# Altium PCB MSP_GSM_Borad.PcbDoc
Units mil, origin at the board's own origin, x right, y up, seen from the top; angles counter-clockwise.
Board outline 5975 x 3158 mil, 2 copper layers (Top Layer, Bottom Layer); 99 components, 97 nets, 460 pads, 782 vias.
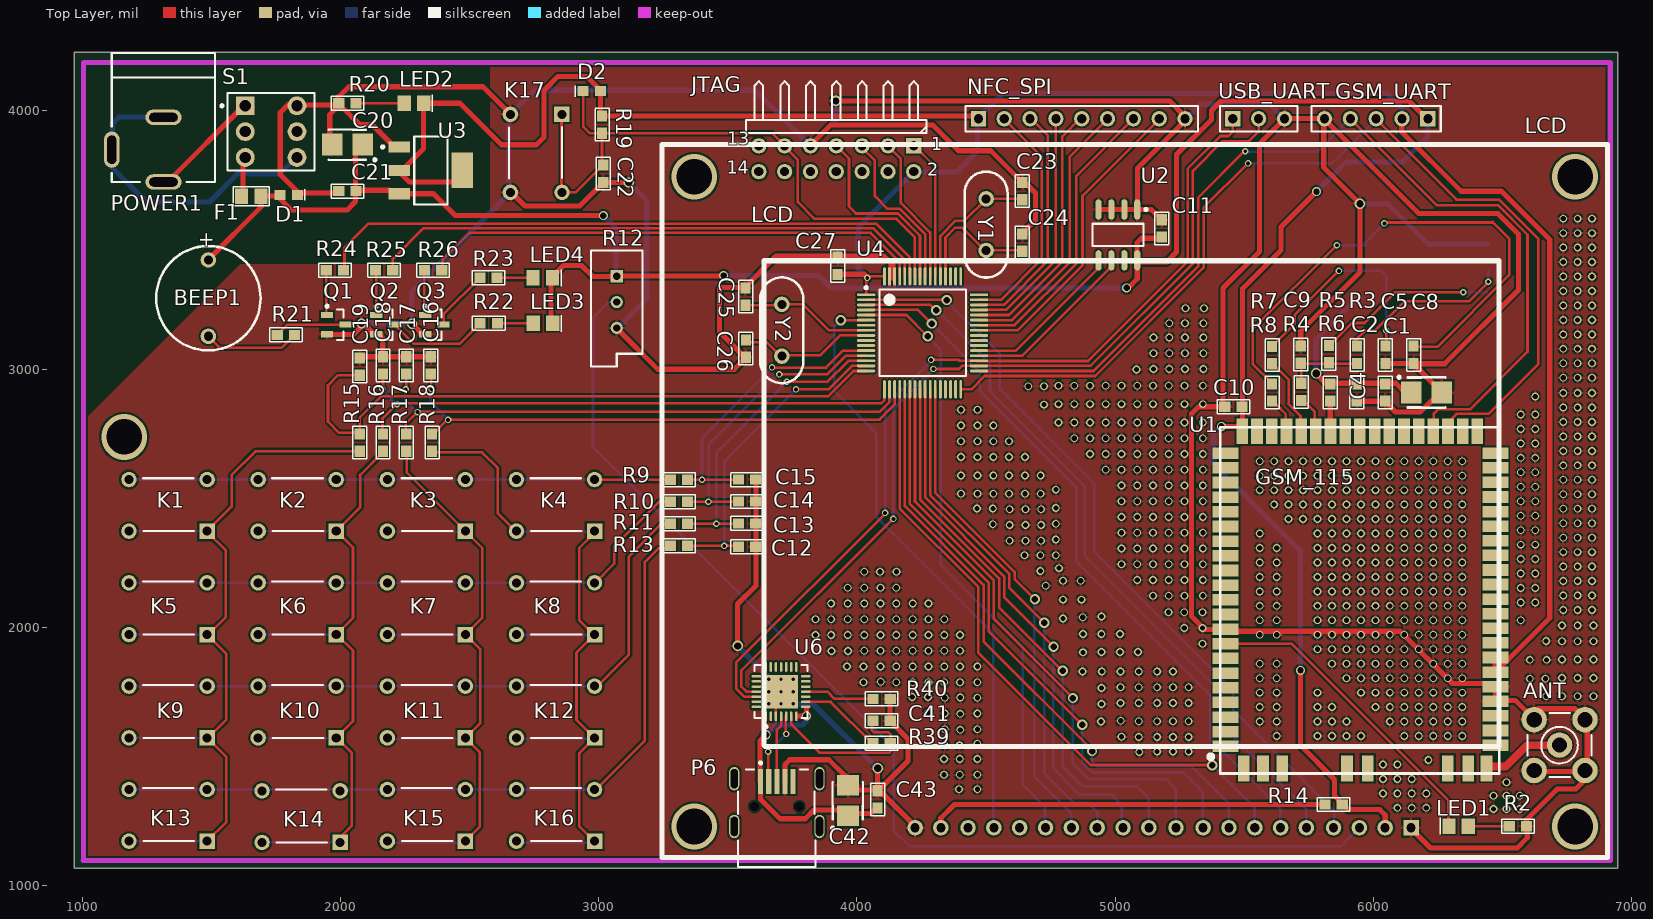
[diagram p0: Top Layer view]
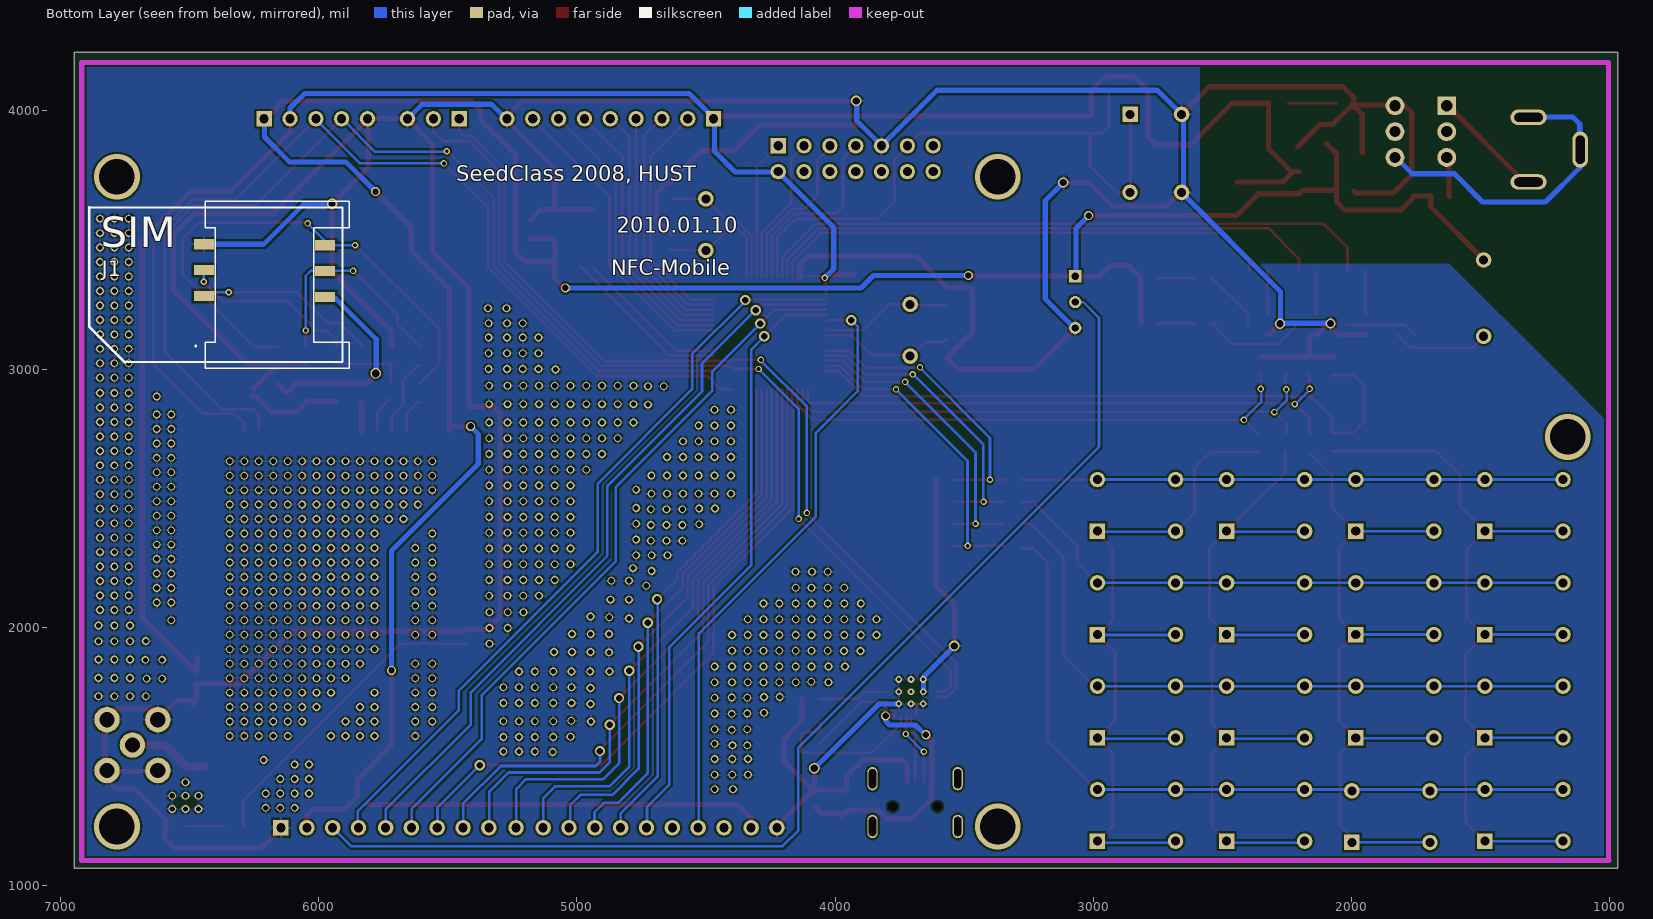
[diagram p1: Bottom Layer view, seen from below]

## Layer stack, top to bottom
Top Layer: signal copper 1.4
Dielectric: dielectric 12.6, FR-4, Dk 4.8
Bottom Layer: signal copper 1.4

## Board outline
970,4227 6945,4227 6945,1069 970,1069

## Design rules (kind name [scope] priority, off if disabled: settings)
Clearance [All] p1: gap=8
ComponentClearance [All] p1: gap=10 collisioncheckmode=3 verticalgap=10
HoleSize [All] p1: absolutevalues=TRUE maxlimit=200 minlimit=1 maxpercent=80.000 minpercent=20.000
PolygonConnect [All] p1: connectstyle=Relief reliefconductorwidth=10 reliefentries=4 polygonreliefangle="90 Angle"
RoutingVias [All] p1: holewidth=20 width=30 viastyle="Through Hole" minholewidth=12 minwidth=25 maxholewidth=196.85 maxwidth=314.96
SolderMaskExpansion [All] p1: expansion=4
TestPointUsage [All] p1: valid=0 allowmultiple=FALSE
Testpoint [All] p1: side=15 testpointundercomponent=TRUE minsize=40 maxsize=100 preferedsize=60 minholesize=0 maxholesize=40 preferedholesize=32 testpointgrid=1 style=1023 order=0-112345678
Width [All] p1: maxlimit=40 minlimit=10 preferedwidth=10
17 further rules are at their usual default settings.

## Classes and differential pairs
component class MSP: BEEP1 C10 C11 C13 C14 C15 C16 C17 C18 C19 C20 C21 C22 C23 C24 C25 C26 C27 C41 C42 C43 D1 D2 F1 GSM_UART JTAG K1 K2 K3 K4 K5 K6 K7 K8 K9 K10 K11 K12 K13 K14 K15 K16 K17 LCD LED2 LED3 LED4 NFC_SPI P6 POWER1 Q1 Q2 Q3 R9 R10 R11 R12 R13 R14 R15 R16 R17 R18 R19 R20 R21 R22 R23 R24 R25 R26 R39 R40 S1 U2 U3 U4 U6 USB_UART Y1 Y2
component class GSMPart: ANT C1 C2 C4 C5 C8 C9 C10 J1 LED1 R2 R3 R4 R5 R6 R7 R8 U1

## Components (designator, comment, footprint, x,y, rotation, side; value= is the part's Value field where it differs from the comment)
ANT "SMB" SMB_V-RJ45 6720,1545 r0 top
BEEP1 "BEEP" BEEP 1489,3423 r270 top
C1 "Cap" 1608[0603] 6045,2910 r90 top
C2 "Cap" 1608[0603] 5935,2910 r90 top
C4 "CAP POL" B 6205,2910 r0 top
C5 "Cap" 1608[0603] 6045.6,3056 r90 top
C8 "Cap" 1608[0603] 6154.8,3056 r90 top
C9 "Cap" 1608[0603] 5718,3057 r270 top
C10 "Cap" 1608[0603] 5457,2855 r0 top
C11 "Cap" 1608[0603] 5180,3545 r270 top
C12 "Cap" 1608[0603] 3575,2313 r0 top
C13 "Cap" 1608[0603] 3575,2403 r0 top
C14 "Cap" 1608[0603] 3575,2488 r0 top
C15 "Cap" 1608[0603] 3575,2573 r0 top
C16 "Cap" 1608[0603] 2350,3015 r90 top
C17 "Cap" 1608[0603] 2255,3015 r90 top
C18 "Cap" 1608[0603] 2165,3015 r90 top
C19 "Cap" 1608[0603] 2075,3010 r90 top
C20 "CAP POL" B 2027,3870 r180 top
C21 "Cap" 1608[0603] 2027,3690 r0 top
C22 "Cap" 1608[0603] 3018,3757 r270 top
C23 "Cap" 1608[0603] 4640,3690 r270 top
C24 "Cap" 1608[0603] 4640,3490 r270 top
C25 "Cap" 1608[0603] 3569,3281 r90 top
C26 "Cap" 1608[0603] 3570,3080 r270 top
C27 "Cap" 1608[0603] 3925,3400 r270 top
C41 "Cap" 1608[0603] 4095,1639 r180 top
C42 "CAP POL" B 3965,1330 r90 top
C43 "Cap" 1608[0603] 4080,1335 r270 top
D1 "1N4001" "1608[0603] - POL" 1800,3675 r180 top
D2 "1N4001" "1608[0603] - POL" 2973,4077 r0 top
F1 "Fuse" 2012[0805] 1655,3670 r0 top
GSM_UART "Header 5" HDR1X5 6210,3970 r180 top
J1 "SIMCard" PCB_SIM 5880,3650 r0 bottom locked
JTAG "Header 7X2H" HDR2X7H 4220,3865 r180 top
K1 "Key" KEY-4 1484,2373.07 r180 top
K2 "Key" KEY-4 1984,2373.07 r180 top
K3 "Key" KEY-4 2484,2373.07 r180 top
K4 "Key" KEY-4 2984,2373.07 r180 top
K5 "Key" KEY-4 1484,1973.07 r180 top
K6 "Key" KEY-4 1984,1973.07 r180 top
K7 "Key" KEY-4 2484,1973.07 r180 top
K8 "Key" KEY-4 2984,1973.07 r180 top
K9 "Key" KEY-4 1484,1573.07 r180 top
K10 "Key" KEY-4 1984,1573.07 r180 top
K11 "Key" KEY-4 2484,1573.07 r180 top
K12 "Key" KEY-4 2984,1573.07 r180 top
K13 "Key" KEY-4 1484,1173.07 r180 top
K14 "Key" KEY-4 1999,1168.07 r180 top
K15 "Key" KEY-4 2484,1173.07 r180 top
K16 "Key" KEY-4 2984,1173.07 r180 top
K17 "MCU_RST" KEY-4 2858,3987 r270 top
LCD "LCD12864" LCD-20PIN 6145,1225 r0 top locked
LED1 "Red LED" "2012[0805] - POL" 6329,1231 r0 top
LED2 "LED" "2012[0805] - POL" 2285,4030 r180 top
LED3 "LED" "2012[0805] - POL" 2784.46,3178 r180 top
LED4 "LED" "2012[0805] - POL" 2783.46,3354 r180 top
NFC_SPI "Header 9" HDR1X9 4470,3970 r0 top
P6 "Mini USB-B" "MINI USB-501" 3690,1100 r270 top
POWER1 "POWER" POWER 1315,3725 r270 top
Q1 "NPN" SOT23-3L 1984,3173 r0 top
Q2 "NPN" SOT23-3L 2174,3173 r0 top
Q3 "NPN" SOT23-3L 2364,3173 r0 top
R2 "RES" 1608[0603] 6559,1231 r180 top
R3 "RES" 1608[0603] 5936.4,3056 r270 top
R4 "RES" 1608[0603] 5720.2,2912 r270 top
R5 "RES" 1608[0603] 5827.2,3059 r270 top
R6 "RES" 1608[0603] 5832,2910 r90 top
R7 "RES" 1608[0603] 5607,3055 r90 top
R8 "RES" 1608[0603] 5607,2910 r90 top
R9 "RES" 1608[0603] 3311,2572 r180 top
R10 "RES" 1608[0603] 3311,2487 r180 top
R11 "RES" 1608[0603] 3311,2402 r180 top
R12 "RPot" VR5 3070,3260 r270 top
R13 "RES" 1608[0603] 3311,2317 r180 top
R14 "Res" 1608[0603] 5845,1315 r0 top
R15 "RES" 1608[0603] 2075,2716 r270 top
R16 "RES" 1608[0603] 2165,2716 r270 top
R17 "RES" 1608[0603] 2255,2716 r270 top
R18 "RES" 1608[0603] 2355,2716 r270 top
R19 "Res" 1608[0603] 3013,3947 r90 top
R20 "Res" 1608[0603] 2027,4030 r180 top
R21 "Res" 1608[0603] 1789,3133 r180 top
R22 "Res" 1608[0603] 2574.46,3178 r180 top
R23 "Res" 1608[0603] 2573.46,3354 r180 top
R24 "Res" 1608[0603] 1979,3383 r180 top
R25 "Res" 1608[0603] 2169,3383 r180 top
R26 "Res" 1608[0603] 2359,3383 r180 top
R39 "Res" 1608[0603] 4095,1552 r180 top
R40 "Res" 1608[0603] 4095,1724 r0 top
S1 "SW-DPDT" DPDT-6 1732,3920 r0 top
U1 "GSM_115" PCB_GSM_115 5407,1435 r180 top locked
U2 "AT24C04" SOIC127P600-8AN 5010,3520 r270 top
U3 "REG1117-3.3" SOT223 2350,3770 r270 top
U4 "MSP430F14X" SQFP50P1200X1200-64N 4254,3141 r0 top locked
U6 "CP2101" QFN50P500X500-28VAN 3706,1752 r90 top
USB_UART "Header 3" HDR1X3 5455,3970 r0 top
Y1 "XTAL" XTAL 4500,3560 r90 top
Y2 "XTAL" XTAL 3709,3151 r90 top

## Footprints (in the part's own frame and the unit in brackets; to place one, negate y for a bottom-side part, rotate by r counter-clockwise, add the part's x,y. Pads: shape width x height; smd on the part's side, far side on the other; paste and mask are expansions set on the pad)
1608[0603] [mm] "Chip Capacitor; Body 1.6 x 0.8 mm (LxW typ)"
  rect 1.1x1 smd: 1(-0.85,0) 2(0.85,0)
  silkscreen extent -1.6,-0.69 1.6,0.69
"1608[0603] - POL" [mm] "Chip Capacitor; Body 1.6 x 0.8 mm (LxW typ)"
  rect 1.1x1 smd: 1(-0.85,0) 2(0.85,0)
  silkscreen extent -1.6,-0.56 -1.6,0.53
2012[0805] [mm] "Chip Resistor; Body 2.0 x 1.3 mm (LxW typ)"
  rect 1.3x1.5 smd: 1(-0.95,0) 2(0.95,0)
  silkscreen extent -1.78,-0.94 1.78,0.94
"2012[0805] - POL" [mm] "Chip Resistor; Body 2.0 x 1.3 mm (LxW typ)"
  rect 1.3x1.5 smd: 1(-0.95,0) 2(0.95,0)
  silkscreen extent -1.8,-0.81 -1.8,0.84
B [mm] "Capacitor, SM Tantalum; Body 3.5 x 2.8 mm (LxW typ)"
  rect 2x2.2 smd: 1(-1.5,0) 2(1.5,0)
  silkscreen extent -2.82,-1.5 1.85,1.62
BEEP [mil]
  round 60 hole 35: 1(0,0) 2(295.28,0)
  silkscreen extent -54,-202 350,202
DPDT-6 [mm] "Double-Pole, Double-Throw Switch; 6 Leads"
  rect 1.85x1.85 hole 1.1: 1(-2.54,2.54)
  round 1.85 hole 1.1: 2(-2.54,0) 3(-2.54,-2.54) 4(2.54,-2.54) 5(2.54,0) 6(2.54,2.54)
  silkscreen extent -4.96,-3.81 4.28,3.81
HDR1X3 [mm] "Connector; Header; 3 Position"
  rect 1.5x1.5 hole 0.9: 1(0,0)
  round 1.5 hole 0.9: 2(2.54,0) 3(5.08,0)
  silkscreen extent -1.27,-1.27 6.35,1.27
HDR1X5 [mm] "Connector; Header; 5 Position"
  rect 1.5x1.5 hole 0.9: 1(0,0)
  round 1.5 hole 0.9: 2(2.54,0) 3(5.08,0) 4(7.62,0) 5(10.16,0)
  silkscreen extent -1.27,-1.27 11.43,1.27
HDR1X9 [mm] "Connector; Header; 9 Position"
  rect 1.5x1.5 hole 0.9: 1(0,0)
  round 1.5 hole 0.9: 2(2.54,0) 3(5.08,0) 4(7.62,0) 5(10.16,0) 6(12.7,0) 7(15.24,0) 8(17.78,0) 9(20.32,0)
  silkscreen extent -1.27,-1.27 21.59,1.27
HDR2X7H [mm] "Connector; Header; 7x2 Position; Right Angle"
  rect 1.5x1.5 hole 0.9: 1(0,0)
  round 1.5 hole 0.9: 2(0,2.54) 3(2.54,0) 4(2.54,2.54) 5(5.08,0) 6(5.08,2.54) 7(7.62,0) 8(7.62,2.54) 9(10.16,0) 10(10.16,2.54) 11(12.7,0) 12(12.7,2.54) 13(15.24,0) 14(15.24,2.54)
  silkscreen extent -1.27,-6.35 16.51,-1.27
KEY-4 [mil]
  rect 60x60 hole 35: 1(0,0)
  round 60 hole 35: 1(302.36,0) 2(0,-200) 2(302.36,-200)
  silkscreen extent 50,-205 248,0
LCD-20PIN [mil]
  rect 60x60 hole 35: 1(0,0)
  round 60 hole 35: 2(-100,0) 3(-200,0) 4(-300,0) 5(-405,0) 6(-505,0) 7(-605,0) 8(-705,0) 9(-805,0) 10(-910,0) 11(-1015,0) 12(-1115,0) 13(-1215,0) 14(-1315,0) 15(-1415,0) 16(-1515,0) 17(-1615,0) 18(-1715,0) 19(-1820,0) 20(-1920,0)
  silkscreen extent -2900,-115 760,2645, body extent -2899,-116 761,2644, height 2362
"MINI USB-501" [mm]
  rect 2.5x0.5 smd: 1(-7.723,-1.6) 2(-7.723,-0.8) 3(-7.723,0) 4(-7.723,0.8) 5(-7.723,1.6)
  round 0.6 hole 0.9 unplated: MH1(-5.25,2.2) MH2(-5.25,-2.2)
  oval 2.3x1 hole 0.7 slot 1.9 at 0 deg: ""(-8.001,4.191) ""(-8.001,-4.191) ""(-3.302,4.191) ""(-3.302,-4.191)
  silkscreen extent -9.67,-3.81 0.7,3.81
PCB_GSM_115 [mil]
  rect 100x45 smd: 1(-20,-105) 2(-20,-161.75) 3(-20,-218.5) 4(-20,-275.25) 5(-20,-332) 6(-20,-388.75) 7(-20,-445.5) 8(-20,-502.25) 9(-20,-559) 10(-20,-615.75) 11(-20,-672.5) 12(-20,-729.25) 13(-20,-786) 14(-20,-842.75) 15(-20,-899.5) 16(-20,-956.25) 17(-20,-1013) 18(-20,-1069.75) 19(-20,-1126.5) 20(-20,-1183.25) 21(-20,-1240) 39(-1065,-1240) 40(-1065,-1183.5) 41(-1065,-1127) 42(-1065,-1070.5) 43(-1065,-1014) 44(-1065,-957.5) 45(-1065,-901) 46(-1065,-844.5) 47(-1065,-788) 48(-1065,-731.5) 49(-1065,-675) 50(-1065,-618.5) 51(-1065,-562) 52(-1065,-505.5) 53(-1065,-449) 54(-1065,-392.5) 55(-1065,-336) 56(-1065,-279.5) 57(-1065,-223) 58(-1065,-166.5) 59(-1065,-110)
  rect 45x100 smd: 22(-85,-1325) 23(-141.87,-1325) 24(-198.75,-1325) 25(-255.62,-1325) 26(-312.5,-1325) 27(-369.37,-1325) 28(-426.25,-1325) 29(-483.12,-1325) 30(-540,-1325) 31(-596.87,-1325) 32(-653.75,-1325) 33(-710.62,-1325) 34(-767.5,-1325) 35(-824.37,-1325) 36(-881.25,-1325) 37(-938.12,-1325) 38(-995,-1325) 60(-1030,-20) 61(-960,-20) 62(-880,-20) 63(-570,-20) 64(-490,-20) 65(-240,-20) 66(-165,-20) 67(-90,-20)
  silkscreen extent -1080,-1340 44,0
PCB_SIM [mm]
  rect 2x1 smd: 1(2.4,9.4) 2(2.4,6.86) 3(2.4,4.32) 4(14.3,4.22) 5(14.3,6.76) 6(14.3,9.3)
  silkscreen extent 0,0 25.6,16.4
POWER [mil]
  oval 60x140 hole 35 slot 110 at 90 deg: 1(0,0) 2(-250,0)
  oval 140x60 hole 35 slot 110 at 0 deg: 2(-125,-200)
  silkscreen extent -500,-200 0,200
QFN50P500X500-28VAN [mm] "28-Pin Plastic Quad Flat No-Lead 0.5 mm Pitch"
  oval 0.95x0.25 smd: 1(-2.425,1.5) 2(-2.425,1) 3(-2.425,0.5) 4(-2.425,0) 5(-2.425,-0.5) 6(-2.425,-1) 7(-2.425,-1.5) 15(2.425,-1.5) 16(2.425,-1) 17(2.425,-0.5) 18(2.425,0) 19(2.425,0.5) 20(2.425,1) 21(2.425,1.5)
  oval 0.25x0.95 smd: 8(-1.5,-2.425) 9(-1,-2.425) 10(-0.5,-2.425) 11(0,-2.425) 12(0.5,-2.425) 13(1,-2.425) 14(1.5,-2.425) 22(1.5,2.425) 23(1,2.425) 24(0.5,2.425) 25(0,2.425) 26(-0.5,2.425) 27(-1,2.425) 28(-1.5,2.425)
  rect 3.3x3.3 smd: 29(0,0)
  silkscreen extent -3.57,-2.6 2.6,2.6, body extent -2.58,-2.58 2.58,2.58, height 1
SMB_V-RJ45 [mm] "Connector; SMB Straight"
  round 2.5 hole 1.5: 1(0,0) 2(-2.5,-2.5) 2(-2.5,2.5) 2(2.5,-2.5) 2(2.5,2.5)
  silkscreen extent -3.15,-3.15 3.15,3.15
SOIC127P600-8AN [mm] "SOIC, 8-Leads, Body 4.9x3.9mm, Pitch 1.27mm, IPC Medium Density"
  oval 2x0.6 smd: 1(-2.5,1.905) 2(-2.5,0.635) 3(-2.5,-0.635) 4(-2.5,-1.905) 5(2.5,-1.905) 6(2.5,-0.635) 7(2.5,0.635) 8(2.5,1.905)
  silkscreen extent -2.62,-2.5 1.1,2.88, body extent -2,-2.5 2,2.5, height 2.72
SOT23-3L [mm] "SOT23, 3-Leads, Body 2.9x1.3mm, Pitch 0.95mm, Lead Span 2.5mm, IPC High Density"
  rect 1.2x0.6 smd: 1(-0.9,0.95) 2(-0.9,-0.95) 3(0.9,0)
  silkscreen extent -1.02,-1.5 0.7,1.92, body extent -0.7,-1.5 0.7,1.5, height 1.1
SOT223 [mm]
  rect 1.1x2.15 smd: 1(-2.3,-3.1) 2(0,-3.1) 3(2.3,-3.1)
  rect 3.5x2.15 smd: 4(0,3.1)
  silkscreen extent -3.35,-4.85 3.35,1.63
SQFP50P1200X1200-64N [mm] "Shrink QFP, 64-Leads, Body 10x10mm, Pitch 0.5mm, IPC Medium Density"
  oval 1.8x0.279 smd: 1(-5.55,3.75) 2(-5.55,3.25) 3(-5.55,2.75) 4(-5.55,2.25) 5(-5.55,1.75) 6(-5.55,1.25) 7(-5.55,0.75) 8(-5.55,0.25) 9(-5.55,-0.25) 10(-5.55,-0.75) 11(-5.55,-1.25) 12(-5.55,-1.75) 13(-5.55,-2.25) 14(-5.55,-2.75) 15(-5.55,-3.25) 16(-5.55,-3.75) 33(5.55,-3.75) 34(5.55,-3.25) 35(5.55,-2.75) 36(5.55,-2.25) 37(5.55,-1.75) 38(5.55,-1.25) 39(5.55,-0.75) 40(5.55,-0.25) 41(5.55,0.25) 42(5.55,0.75) 43(5.55,1.25) 44(5.55,1.75) 45(5.55,2.25) 46(5.55,2.75) 47(5.55,3.25) 48(5.55,3.75)
  oval 0.279x1.8 smd: 17(-3.75,-5.55) 18(-3.25,-5.55) 19(-2.75,-5.55) 20(-2.25,-5.55) 21(-1.75,-5.55) 22(-1.25,-5.55) 23(-0.75,-5.55) 24(-0.25,-5.55) 25(0.25,-5.55) 26(0.75,-5.55) 27(1.25,-5.55) 28(1.75,-5.55) 29(2.25,-5.55) 30(2.75,-5.55) 31(3.25,-5.55) 32(3.75,-5.55) 49(3.75,5.55) 50(3.25,5.55) 51(2.75,5.55) 52(2.25,5.55) 53(1.75,5.55) 54(1.25,5.55) 55(0.75,5.55) 56(0.25,5.55) 57(-0.25,5.55) 58(-0.75,5.55) 59(-1.25,5.55) 60(-1.75,5.55) 61(-2.25,5.55) 62(-2.75,5.55) 63(-3.25,5.55) 64(-3.75,5.55)
  silkscreen extent -5.67,-4.25 4.25,4.57, body extent -5,-5 5,5, height 2.2
VR5 [mm] "Potentiometer; 3 Leads"
  rect 1.2x1.2 hole 0.7: 1(-2.54,0)
  round 1.2 hole 0.7: 2(0,0) 3(2.54,0)
  silkscreen extent -5.08,-2.54 6.35,2.54
XTAL [mil]
  round 60 hole 35: 1(-100,0) 2(100,0)
  silkscreen extent -205,-83 205,83

## Part data
ANT: "SMB Straight Connector"
C1 C2 C5 C8 C9 C10 C11 C12 C13 C14 C15 C16 C17 C18 C19 C21 C22 C23 C24 C25 C26 C27 C41 C43: "Capacitor"
C4: library part Cap, "Capacitor"
C20 C42: "Polarized Capacitor (Axial)"
D1 D2: library part "Diode 1N4001", "1 Amp General Purpose Rectifier"
F1: library part FUSE1
GSM_UART USB_UART: library part "Header 4", "Header, 4-Pin"
J1: "Sim Card"
JTAG: "Header, 7-Pin, Dual row, Right Angle"
K1 K2 K3 K4 K5 K6 K7 K8 K9 K10 K11 K12 K13 K14 K15 K16 K17: library part SW-PB
LED1: library part LED
NFC_SPI: "Header, 9-Pin"
P6: library part USB, "Mini USB Type B"
R2 R3 R4 R5 R6 R7 R8 R9 R10 R11 R13 R15 R16 R17 R18: "Resistor"
R12: "Potentiometer"
R14 R19 R20 R21 R22 R23 R24 R25 R26 R39 R40: library part RES, "Resistor"
S1: "Double-Pole, Double-Throw Switch"
U1: library part GSM115
U4: library part F14X
Y1 Y2: "Crystal Oscillator"

## Via types
v1: diameter 30, hole 20, Top Layer to Bottom Layer, 710 vias
v2: diameter 25, hole 15, Top Layer to Bottom Layer, 29 vias
v3: diameter 40, hole 25, Top Layer to Bottom Layer, 13 vias
v4: diameter 25.98, hole 12.99, Top Layer to Bottom Layer, tented top, 9 vias
v5: diameter 35, hole 25, Top Layer to Bottom Layer, 8 vias
v6: diameter 40, hole 28, Top Layer to Bottom Layer, 7 vias
v7: diameter 177.17, hole 137.8, Top Layer to Bottom Layer, 5 vias
v8: diameter 40, hole 30, Top Layer to Bottom Layer, 1 vias

## Nets (pads, with @x,y where several pads share a name; then routed paths per layer and width w, separated by ;. In a path a pad name is that pad's centre, name@x,y a point inside that pad or via, vN(x,y) a via of type N, cw(c..) or ccw(c..) an arc to the next point about the centre after c; other vN are vias at no path point)
BEEP: R24.1 U4.59 | length 2440.6
  Top Layer w10: R24.1@2016,3385 2016,3471 2109,3564 4072.93,3564 4204.79,3432.14 U4.59
C0: K1.1 K5.1 K9.1 K13.1 R15.2 | length 3391.1
  Top Layer w10: K9.1@1181,1573 K9.1@1181.07,1573.07 ; K13.1@1484,1173.07 1559,1248.07 1559,1499 K9.1@1485,1573 ; K5.1@1484,1973.07 1558,1899.07 1558,1643 K9.1@1485,1570 ; K5.1@1486,1970 1557,2041 1557,2298 K1.1@1488,2367 ; K1.1@1486,2375 1579,2468 1579,2590 1671,2682 R15.2@2077,2682 ; K13.1@1486.07,1173.07 K13.1@1487,1174
  Bottom Layer w10: K5.1@1177,1973 K5.1@1486,1973 ; K1.1@1180.93,2373.07 K1.1@1484,2373.07 ; K9.1@1181.07,1573.07 K9.1@1484,1573.07 ; K13.1@1181.64,1173.07 K13.1@1486.07,1173.07
C1: K2.1 K6.1 K10.1 K14.1 R16.2 | length 2958.9
  Top Layer w10: K14.1@1985.64,1174.07 2044,1232.43 2044,1515.71 1985.64,1574.07 2049,1637.43 2049,1910.71 1985.64,1974.07 2049,2037.43 2049,2310.71 1985.64,2374.07 2076.78,2465.22 ; 2075,2589 R16.2@2165,2679 ; 2077,2465 2077,2591
  Bottom Layer w10: K10.1@1675,1571 1978,1571 K10.1@1980,1573 ; K6.1@1681.64,1973.07 1985.07,1973.07 K6.1@1987,1975 ; K2.1@1681.64,2373.07 1983.07,2373.07 K2.1@1985,2375 ; K14.1@1691,1169 1994,1169 K14.1@1997,1166
C2: K3.1 K7.1 K11.1 K15.1 R17.2 | length 2963
  Top Layer w10: R17.2@2257,2682 2257,2600 2550,2307 2550,2039.07 2484,1973.07 2542.07,1915 2542.07,1631.14 2484,1573.07 2540,1517.07 2540,1229.07 K15.1@2484,1173.07
  Bottom Layer w10: K11.1@2176,1569 K11.1@2479,1569 ; K7.1@2182.64,1971.07 K7.1@2486.07,1971.07 ; K3.1@2182.64,2371.07 K3.1@2484.07,2371.07 ; K15.1@2192,1167 K15.1@2495,1167
C3: K4.1 K8.1 K12.1 K16.1 R18.2 | length 3112.6
  Top Layer w10: R18.2@2357,2678 2549,2678 2610,2617 2610,2442 K4.1@2680,2372 ; K16.1@2980,1176 2924,1232 2924,1513 2984,1573 2914,1643 2914,1903 2984,1973 2980,1973 2924,2029 2924,2307 2980,2363 K4.1@2980,2369
  Bottom Layer w10: K12.1@2675,1569 K12.1@2978,1569 ; K8.1@2681.64,1971.07 K8.1@2985.07,1971.07 ; K4.1@2681.64,2371.07 K4.1@2983.07,2371.07 ; K16.1@2691,1167 K16.1@2994,1167
CTS: U6.23
D+: P6.3 U6.4 | length 258.5
  Top Layer w10: P6.3@3689,1407 3689,1603 3707,1621 U6.4@3707,1658
D-: P6.2 U6.5 | length 282.2
  Top Layer w10: P6.2@3657,1406 v2@3657,1519 ; v2@3725,1588 U6.5@3725,1658
  Bottom Layer w10: v2@3657,1519 3725,1587 v2@3728,1587
  other v2: 3656,1519 3726,1588
DB0: LCD.7 U4.20 | length 2545.4
  Top Layer w10: U4.20 4165.42,2461.58 4470,2157 4470,1902 4904,1468 v3@5375,1468
  Bottom Layer w10: v3@5375,1468 5539,1304 LCD.7@5539,1222
  other v3: 5376,1467
DB1: LCD.8 U4.21 | length 2432.7
  Top Layer w10: U4.21 4185.1,2470.18 4490,2165.28 4490,1946 v3@4911,1525
  Bottom Layer w10: v3(4910,1522) 4910,1481 4927,1464 5294,1464 5440,1318 LCD.8@5440,1222
DB2: LCD.9 U4.22 | length 2373.1
  Top Layer w10: U4.22 4204.79,2478.78 4510,2173.57 4510,1986 v3(4872,1624)
  Bottom Layer w10: v3(4872,1624) 4872,1479 4912,1439 5264,1439 5338,1365 LCD.9@5338,1225
DB3: LCD.10 U4.23 | length 2297.2
  Top Layer w10: U4.23 4224.47,2487.38 4530,2181.85 4530,2034 v3@4837,1727
  Bottom Layer w10: v3@4836,1729 4836,1474 4897,1413 5196,1413 5234,1375 LCD.10@5234,1221
  other v3: 4836,1727
DB4: LCD.11 U4.24 | length 2191.4
  Top Layer w10: U4.24 4244.16,2495.98 4550,2190.14 4550,2078 v3@4796,1832
  Bottom Layer w10: v3@4796,1834 4796,1463 4874,1385 5084,1385 5130,1339 LCD.11@5130,1223
  other v3: 4797,1833
DB5: LCD.12 U4.25 | length 2088.8
  Top Layer w10: U4.25 4263.84,2504.58 4570,2198.42 4570,2118 v3@4761,1927
  Bottom Layer w10: v3@4760,1929 4760,1454 4862,1352 4986,1352 5025,1313 LCD.12@5025,1224
  other v3: 4761,1926
DB6: LCD.13 U4.26 | length 1999.9
  Top Layer w10: U4.26 4283.53,2513.18 4590,2206.71 4590,2154 v3@4725.5,2018.5
  Bottom Layer w10: v3@4725.5,2018.5 4725.5,1435.5 4840,1321 4895,1321 4931,1285 LCD.13@4931,1223
  other v3: 4725,2019
DB7: LCD.14 U4.27 | length 1916.9
  Top Layer w10: U4.27 4303.21,2521.78 4610,2214.99 4610,2188 v3@4685,2113
  Bottom Layer w10: v3@4687,2113 4687,1423 4830,1280 LCD.14@4830,1223
  other v3: 4689,2110
DCD: U6.1
DSR: U6.27
DTR: U6.28
EN: LCD.6 U4.4 | length 2790.6
  Top Layer w10: U4.4 4235.42,3229.58 v3@4288.5,3176.5
  Bottom Layer w10: v3@4286,3178 4288,3178 4476,2990 4476,2915 4849,2542 4849,2256 5368,1737 5368,1568 5639,1297 LCD.6@5639,1224
  other v3: 4289,3177
GND: ANT.2 C1.1 C2.1 C4.2 C5.1 C8.1 C9.1 C10.1 C11.1 C12.2 C13.2 C14.2 C15.2 C16.2 C17.2 C18.2 C19.2 C20.2 C21.1 C22.2 C23.1 C24.1 C25.2 C26.2 C27.1 C41.1 C42.2 C43.1 D1.1 GSM_UART.5 J1.4 JTAG.9 K17.2 LCD.1 LCD.20 NFC_SPI.9 P6.4 Q1.2 Q2.2 Q3.2 R2.1 R12.3 R20.2 R40.2 S1.6 U1.9 U1.55 U1.56 U2.1 U2.2 U2.3 U2.4 U3.1 U4.62 U4.63 U6.3 U6.29 USB_UART.3 | length 23817.6
  Top Layer w10: U6.29@3659,1705 3685,1705 3686,1706 U6.3@3686,1656 ; U4.63@4126.05,3359 U4.63@4127,3359 ; U4.63@4127,3358 4127,3407
  Top Layer w20: S1.6@1827,4026 1799,4026 1767,3994 1767,3754 1839,3682 1984,3682 C21.1@1991,3689 ; S1.6@1829,4023 R20.2@1982,4023 ; Q1.2@1945,3135 2051,3135 2082,3166 v6(2082,3177) ; C20.2@1959,3838 1959,3986 R20.2@1999,4026 ; R20.2@1990,4029 1990,4014 2007,4014 2074,3947 2123,3947 U3.1@2209,3861 ; R20.2@1992,4030 1992,4053 2033,4094 2552,4094 K17.2@2658,3988 ; C19.2@2069.54,3048.46 C16.2 ; v6@2081,3177 2089,3177 2130,3136 2148,3136 2164,3120 C18.2@2164,3047 ; v6(2277,3176) 2278,3176 2320,3134 Q3.2@2329,3134 ; K17.2@2666,3681 2715,3632 2927,3632 C22.2@3019,3724 ; C22.2@3023,3725 3025,3723 v6(3116,3723) ; R12.3@3069,3160 3229,3000 3525,3000 3568,3043 3568,3044 3468,3144 3468,3311 3473,3316 C25.2@3568,3316 ; v6(3538,1929) 3538,2091 3608.46,2161.46 C15.2 ; C25.2@3566.23,3317.23 3687,3438 4103.86,3438 4139,3402.86 4139,3351 ; P6.4 3721.51,1469.51 3740,1488 3891,1488 3955,1424 C42.2@3955,1370 ; JTAG.9@3819,3866 3898,3945 4294,3945 4393,3846 4518,3846 C23.1@4638,3726 ; v6@3920,4038 5211,4038 5270,3979 NFC_SPI.9@5270,3969 ; C42.2@3953,1371 4085,1371 4197.93,1483.93 4197.93,1569 4128.46,1638.46 R40.2 ; C43.1@4079,1369 4087,1369 LCD.20@4226,1230 ; v6@4079,1454 4079,1366.46 C43.1@4084.54,1366.46 ; C24.1@4636,3523 4691,3578 4691,3682 4652,3721 C23.1@4640,3721 ; U2.4@4933.43,3618.43 U2.1 ; C11.1@5180,3578 5139,3619 5086,3619 5086,3778 5267,3959 NFC_SPI.9@5267,3969 ; U1.9 5435,1986 6102,1986 6305,1783 6472,1783 6472,1713 U1.56@6484.5,1700.5 ; U1.9@5428,1993 5346,1993 5295,2044 5295,2828 5322,2855 5417,2855 5417,3314 5558,3455 5558,3873 5656,3971 GSM_UART.5@5819,3971 ; C9.1@5718,3086 5718,3147 5948,3377 5948,3640 5807,3781 GSM_UART.5@5807,3972 ; GSM_UART.5@5811,3971 5811,3967 6175,3603 6481,3603 6561,3523 6561,3307 6275,3021 ; C2.1@5933,2876 6043,2876 6085,2834 6181,2834 6244,2897 C4.2@6258,2897 ; C5.1@6046.93,3021 6048.46,3022.54 C8.1 ; LCD.1@6139,1228 6220,1147 6556,1147 6595,1186 R2.1@6595,1228 ; C8.1@6150,3021 6276,3021 ; C8.1@6158,3018 6158,3017 C4.2@6251,2924 ; U1.56@6474,1717 6550,1717 ANT.2@6625,1642 ; R2.1@6591,1220 6591,1255 6711,1375 6783,1375 6827,1419 6827,1638 6779.5,1685.5 ANT.2@6637.5,1685.5 ; ANT.2@6620,1443 ANT.2@6818,1443
  Bottom Layer w20: v6(2082,3177) 2083,3178 2275,3178 v6(2277,3176) ; v6@2276,3178 2276,3301 K17.2@2659,3684 ; K17.2@2651,3689 K17.2@2651,3987 ; K17.2@2656,3986 2658,3986 2752,4080 3605,4080 JTAG.9@3819,3866 ; R12.3@3072.5,3158.5 3186,3272 3186,3653 v6(3116,3723) ; v6(3538,1929) 3658,1809 v4@3658,1751 ; v4@3754,1704 3830,1704 v6@4077,1457 ; JTAG.9@3819,3865 3916,3962 v6@3916,4040 ; JTAG.9@3820,3867 JTAG.9@3821,3866 ; NFC_SPI.9@5267,3969 5273,3969 5330,4026 5598,4026 USB_UART.3@5654,3970 ; NFC_SPI.9@5268,3969 NFC_SPI.9@5268,3974 ; v6(5947,3641) 6055,3641 6212,3484 J1.4@6440,3484
  other v1: 6464,1298 6515,1298 6566,1298 6092,1302 6148,1302 6204,1302 6464,1349 6515,1349 6566,1349 6036,1358 6092,1358 6148,1358 6204,1358 4395,1374 4466,1374 6515,1401 6036,1414 6092,1414 6148,1414 4337,1430 4398,1430 4466,1430 6036,1470 6092,1470 6212,1487 4337,1491 4398,1491 4466,1491 5093,1518 5162,1520 5223,1520 5284,1520 4340,1544 4397,1544 4466,1550 5091,1576 5162,1576 5223,1576 5284,1576 5024,1577 5625,1580 5783,1580 5839,1580 5895,1580 5951,1580 6119,1580 6175,1580 6231,1580 6287,1580 6343,1580 4400,1604 4340,1606 4466,1606 4945,1636 5559,1636 5625,1636 5783,1636 5839,1636 5895,1636 6063,1636 6119,1636 6175,1636 6231,1636 6287,1636 6343,1636 5091,1637 5162,1637 5223,1637 5284,1637 5021,1639 4400,1666 4340,1667 4466,1667 4275,1670 5559,1692 5625,1692 5783,1692 5839,1692 6007,1692 6063,1692 6119,1692 6175,1692 6231,1692 6287,1692 6343,1692 4947,1704 5020,1708 5091,1708 5162,1708 5223,1708 5284,1708 4340,1728 4466,1728 4400,1729 4214,1731 4275,1731 6668,1734 6729,1734 6790,1734 6851,1734 5559,1748 5625,1748 5783,1748 5951,1748 6007,1748 6063,1748 6119,1748 6175,1748 6231,1748 6287,1748 6343,1748 4947,1766 5020,1769 5091,1769 5162,1769 5223,1769 5284,1769 4025,1788 4152,1788 4216,1788 4277,1788 4338,1788 4399,1788 4466,1788 4092,1790 6605,1802 6665,1802 5559,1804 5625,1804 5895,1804 5951,1804 6007,1804 6063,1804 6119,1804 6175,1804 6231,1804 6287,1804 6343,1804 6729,1805 6790,1805 6851,1805 4873,1830 4948,1830 5020,1830 5091,1830 5162,1830 5223,1830 3961,1849 4025,1849 4091,1849 4152,1849 4216,1849 4277,1849 4338,1849 4399,1849 4466,1849 5559,1860 5625,1860 5839,1860 5895,1860 5951,1860 6007,1860 6063,1860 6119,1860 6175,1860 6231,1860 6287,1860 6343,1860 6605,1875 6670,1875 6729,1876 6790,1876 6851,1876 4875,1904 4947,1905 5018,1905 5088,1905 3901,1909 3965,1909 4028,1910 4091,1910 4152,1910 4216,1910 4277,1910 4338,1910 4399,1910 5783,1916 5839,1916 5895,1916 5951,1916 6007,1916 6063,1916 6119,1916 6175,1916 6231,1916 6287,1916 6343,1916 5338,1937 6729,1947 6790,1947 6851,1947 6668,1948 3839,1971 3900,1971 3964,1971 4028,1971 4091,1971 4152,1971 4216,1971 4277,1971 4338,1971 4399,1971 5559,1972 5625,1972 5783,1972 5839,1972 5895,1972 5951,1972 6007,1972 6063,1972 6119,1972 6175,1972 6231,1972 6287,1972 6343,1972 4875,1975 4946,1975 5018,1975 5267,1998 5338,1998 6729,2008 6790,2008 6851,2008 5559,2028 5625,2028 5783,2028 5839,2028 5895,2028 5951,2028 6007,2028 6063,2028 6119,2028 6175,2028 6231,2028 6287,2028 6343,2028 6570,2028 3839,2032 3900,2032 3964,2032 4028,2032 4091,2032 4152,2032 4216,2032 4277,2032 4338,2032 4798,2035 4874,2040 4947,2043 5206,2059 5267,2059 5338,2059 6734,2068 6790,2068 6846,2068 5559,2084 5625,2084 5783,2084 5839,2084 5895,2084 5951,2084 6007,2084 6063,2084 6119,2084 6175,2084 6231,2084 6287,2084 6343,2084 3900,2093 3964,2093 4028,2093 4091,2093 4152,2093 4216,2093 4277,2093 6570,2097 6626,2097 4798,2108 4869,2108 5146,2123 5207,2123 5268,2123 5339,2123 6734,2124 6790,2124 6846,2124 5559,2140 5625,2140 5783,2140 5839,2140 5895,2140 5951,2140 6007,2140 6063,2140 6119,2140 6175,2140 6231,2140 6287,2140 6343,2140 6570,2153 6626,2153 3964,2154 4028,2154 4091,2154 4152,2154 4731,2162 6734,2180 6790,2180 6846,2180 4798,2181 4866,2181 5085,2184 5146,2184 5207,2184 5268,2184 5339,2184 5559,2196 5625,2196 5783,2196 5839,2196 5895,2196 5951,2196 6007,2196 6063,2196 6119,2196 6175,2196 6231,2196 6287,2196 6343,2196 6570,2209 6626,2209 4028,2216 4089,2216 4153,2216 4710,2219 4782,2230 6734,2236 6790,2236 6846,2236 5024,2245 5085,2245 5146,2245 5207,2245 5268,2245 5339,2245 5559,2252 5625,2252 5783,2252 5839,2252 5895,2252 5951,2252 6007,2252 6063,2252 6119,2252 6175,2252 6231,2252 6287,2252 6343,2252 6570,2265 6626,2265 4649,2280 4710,2280 4770,2280 6734,2292 6790,2292 6846,2292 5024,2306 5085,2306 5146,2306 5207,2306 5268,2306 5339,2306 5559,2308 5625,2308 5783,2308 5839,2308 5895,2308 5951,2308 6007,2308 6063,2308 6119,2308 6175,2308 6231,2308 6287,2308 6343,2308 6570,2321 6626,2321 4591,2336 4652,2336 4713,2336 4770,2341 6734,2348 6790,2348 6846,2348 5559,2364 5783,2364 5839,2364 5895,2364 5951,2364 6007,2364 6063,2364 6119,2364 6175,2364 6231,2364 6287,2364 6343,2364 5024,2367 5085,2367 5146,2367 5207,2367 5268,2367 5339,2367 6570,2377 6626,2377 4591,2397 4652,2397 4713,2397 4526,2400 4770,2402 6734,2404 6790,2404 6846,2404 5671,2420 5727,2420 5783,2420 5839,2420 5895,2420 5951,2420 6007,2420 6063,2420 6119,2420 6175,2420 6231,2420 6287,2420 6343,2420 5024,2428 5085,2428 5146,2428 5207,2428 5268,2428 5339,2428 6570,2433 6626,2433 4591,2458 4652,2458 4713,2458 6734,2460 6790,2460 6846,2460 4465,2461 4526,2461 4770,2463 5615,2476 5671,2476 5727,2476 5783,2476 5839,2476 5895,2476 5951,2476 6007,2476 6063,2476 6119,2476 6175,2476 6231,2476 6287,2476 6343,2476 5024,2489 5085,2489 5146,2489 5207,2489 5268,2489 5339,2489 6570,2489 6626,2489 6734,2516 6790,2516 6846,2516 4403,2518 4467,2518 4528,2518 4589,2518 4650,2518 4711,2518 5559,2532 5615,2532 5671,2532 5727,2532 5783,2532 5839,2532 5895,2532 5951,2532 6007,2532 6063,2532 6119,2532 6175,2532 6231,2532 6287,2532 6343,2532 4770,2534 6570,2545 6626,2545 5024,2550 5085,2550 5146,2550 5207,2550 5268,2550 5339,2550 6734,2572 6790,2572 6846,2572 5559,2588 5615,2588 5671,2588 5727,2588 5783,2588 5839,2588 5895,2588 5951,2588 6007,2588 6063,2588 6119,2588 6175,2588 6231,2588 6287,2588 6343,2588 4403,2589 4467,2589 4528,2589 4589,2589 4650,2589 4711,2589 6570,2601 6626,2601 4963,2611 5024,2611 5085,2611 5146,2611 5207,2611 5268,2611 5339,2611 6734,2628 6790,2628 6846,2628 5559,2644 5615,2644 5671,2644 5727,2644 5783,2644 5839,2644 5895,2644 5951,2644 6007,2644 6063,2644 6119,2644 6175,2644 6231,2644 6287,2644 6343,2644 6570,2657 6626,2657 4403,2660 4467,2660 4528,2660 4589,2660 4650,2660 4902,2672 4963,2672 5024,2672 5085,2672 5146,2672 5207,2672 5268,2672 5339,2672 6734,2684 6790,2684 6846,2684 6570,2713 6626,2713 4403,2721 4467,2721 4528,2721 4589,2721 4841,2733 4902,2733 4963,2733 5024,2733 5085,2733 5146,2733 5207,2733 5268,2733 5339,2733 6734,2740 6790,2740 6846,2740 6570,2769 6626,2769 4403,2782 4467,2782 4528,2782 4780,2794 4841,2794 4902,2794 4963,2794 5024,2794 5085,2794 5146,2794 5207,2794 5268,2794 5339,2794 6734,2796 6790,2796 6846,2796 6570,2825 6626,2825 4403,2843 4467,2843 6734,2852 6790,2852 6846,2852 4724,2863 4780,2865 4841,2865 4902,2865 4963,2865 5024,2865 5085,2865 5146,2865 5207,2865 5268,2865 5339,2865 6626,2895 6734,2908 6790,2908 6846,2908 4663,2934 4724,2934 4780,2936 4841,2936 4902,2936 4963,2936 5024,2936 5085,2936 5146,2936 5207,2936 5268,2936 5339,2936 6734,2967 6790,2967 6846,2967 5082,2999 5148,3001 5209,3001 5270,3001 5341,3001 6734,3023 6790,3023 6846,3023 5148,3062 5209,3062 5270,3062 5341,3062 6734,3079 6790,3079 6846,3079 5148,3123 5209,3123 5270,3123 5341,3123 6734,3135 6790,3135 6846,3135 5209,3178 5270,3178 5341,3178 6734,3191 6790,3191 6846,3191 5272,3236 5343,3236 6734,3247 6790,3247 6846,3247 6734,3303 6790,3303 6846,3303 6734,3359 6790,3359 6846,3359 6734,3415 6790,3415 6846,3415 6734,3471 6790,3471 6846,3471 6734,3527 6790,3527 6846,3527 6734,3583 6790,3583 6846,3583
  other v4: 3658.76,1704.76 3706,1704.76 3753.24,1704.76 3658.76,1752 3706,1752 3753.24,1752 3658.76,1799.24 3706,1799.24 3753.24,1799.24
  other v6: 4080,1455 3918,4039
IRQ: NFC_SPI.7 U4.42 | length 1126.4
  Top Layer w10: U4.42 4610.53,3170.53 4849,3409 4849,3749 NFC_SPI.7@5069,3969
KC0: C19.1 R15.1 U4.16 | length 2516.2
  Top Layer w10: R15.1@2074,2754 1995,2754 1952,2797 1952,2938 1991,2977 C19.1@2075,2977 ; R15.1@2075,2752 2075,2813 2157,2895 3887.5,2895 3985.86,2993.36 U4.16
KC1: C18.1 R16.1 U4.17 | length 2209.1
  Top Layer w10: R16.1@2163,2749 2163,2809 2222,2868 4094,2868 4106,2880 U4.17@4106,2919 ; v2@2165,2927 C18.1
  Bottom Layer w10: v2(2163,2924) 2163,2920 v2@2219,2864
  other v2: 2220,2865
KC2: C17.1 R17.1 U4.18 | length 2157
  Top Layer w10: R17.1@2253,2752 2253,2789 2299,2835 4087,2835 4125.27,2873.27 U4.18@4125.27,2921.72 ; v2@2255,2922 C17.1
  Bottom Layer w10: v2@2251,2918 2251,2881 v2@2299,2833
  other v2: 2299,2834 2253,2922
KC3: C16.1 R18.1 U4.19 | length 2092.2
  Top Layer w10: v2@2352,2927 C16.1@2352,2980 ; R18.1@2358,2748 2415,2805 4088,2805 4145.73,2862.73 U4.19
  Bottom Layer w10: v2@2350,2921 2350,2873 v2@2418,2805
  other v2: 2417,2804 2352,2924
KR0: C15.1 R9.1 U4.12 | length 1144.4
  Top Layer w10: R9.1 C15.1@3544,2572 ; v2@3668,3003 3671,3006 3880,3006 3946.1,3072.1 U4.12 U4.12@4034.72,3071.32
  Bottom Layer w10: v2@3400,2571 3400,2734 v2@3672,3006
  other v2: 3400,2572 3671,3007
KR1: C14.1 R10.1 U4.13 | length 1174.2
  Top Layer w10: R10.1 C14.1@3537,2487 ; v2@3694,2976 3699,2981 3885,2981 3957,3053 4034.91,3053 U4.13
  Bottom Layer w10: v2@3426,2487 3426,2709 v2@3699,2982
  other v2: 3425,2487 3699,2980
KR2: C13.1 R11.1 U4.14 | length 1198.9
  Top Layer w10: R11.1 C13.1@3544,2402 ; v2@3729,2952 3886,2952 3966.73,3032.73 U4.14 U4.14@4035.23,3033
  Bottom Layer w10: v2@3456,2405 3456,2678 v2(3729,2951)
  other v2: 3456,2402
KR3: C12.1 R13.1 U4.15 | length 1225.9
  Top Layer w10: R13.1 C12.1@3542,2317 ; v2(3764,2922) 3889,2922 3980.05,3013.05 U4.15
  Bottom Layer w10: v2@3487,2319 3487,2645 v2@3765,2923
  other v2: 3486,2316
LED1: R25.1 U4.60 | length 2187.2
  Top Layer w10: R25.1@2203,3386 2203,3427 2322,3546 4062.65,3546 4185.1,3423.55 U4.60
LED2: R26.1 U4.61 | length 1954.4
  Top Layer w10: R26.1@2396,3385 2396,3425 2499,3528 4052.36,3528 4165.42,3414.95 U4.61
NetANT_1: ANT.1 U1.60 | length 313
  Top Layer w30: U1.60@6442,1462 6512,1462 6594,1544 ANT.1@6721,1544
NetBEEP1_2: BEEP1.2 R21.1 | length 372.7
  Top Layer w10: BEEP1.2 1533.72,3083 1772.46,3083 R21.1
NetC1_2: C1.2 C2.2 C4.1 J1.1 R6.2 | length 791.8
  Top Layer w20: v8@5776,2984 5817,2943 R6.2@5834,2943 ; R6.2@5832,2946 6086,2946 C4.1@6120,2912 ; C4.1@6128,2912 C4.1@6159,2943
  Bottom Layer w20: v8@5776,2984 5776,3116 5935,3275 J1.1@5949,3275
  other v8: 5778,2984
NetC5_2: C5.2 J1.2 R7.2 | length 861.2
  Top Layer w10: R7.2@5607,3089 5695,3177 ; 5694,3177 5694,3210 v2@5865,3381 ; C5.2@6049,3090 v2(6049,3150)
  Bottom Layer w10: v2@5867,3381 6030,3381 6049,3362 v2(6049,3150)
  other v2: 5866,3381
NetC8_2: C8.2 J1.3 R8.2 | length 2057
  Top Layer w10: 5533,3157 5533,3019 R8.2@5608,2944 ; 5534,3157 5857,3480 v2(5858,3480) ; v2@6046,3568 6461,3568 ; C8.2@6157,3087 6247,3087 6525,3365 6525,3506 6461,3570
  Bottom Layer w10: v2(5858,3480) J1.3@5970,3480 ; J1.3@5965,3486 6041,3562 v2@6041,3568
  other v2: 6042,3565
NetC9_2: C9.2 R3.2 R4.1 R5.2 | length 292.3
  Top Layer w10: C9.2@5715,3022 R3.2@5936,3022 ; R4.1@5720.2,2948.2 C9.2@5720.2,3019.54
NetC23_2: C23.2 U4.53 Y1.2 | length 523.2
  Top Layer w10: U4.53 4322.9,3515.9 4382,3575 4416,3575 Y1.2@4501,3660 ; Y1.2 C23.2@4629,3660
NetC24_2: C24.2 U4.52 Y1.1 | length 502.2
  Top Layer w10: U4.52 4342.58,3510.13 4380.46,3548 4407,3548 Y1.1@4500,3455 ; Y1.1@4499,3461 C24.2@4639,3461
NetC25_1: C25.1 U4.8 Y2.2 | length 509.4
  Top Layer w10: C25.1 3705.54,3247.54 Y2.2 3791,3251 3891.16,3150.84 U4.8
NetC26_1: C26.1 U4.9 Y2.1 | length 521.7
  Top Layer w10: C26.1 3578.46,3105 3650,3105 3700.54,3054.46 3858.46,3054.46 3935.16,3131.16 U4.9
NetC41_2: C41.2 R39.1 U6.6 | length 637.4
  Top Layer w10: U6.6@3746,1656 3746,1624 3854,1516 4125,1516 4131,1522 4131,1585 4121,1595 4065,1595 4056.5,1603.5 C41.2@4056.5,1631.5
NetF1_1: F1.1 S1.3 | length 156.5
  Top Layer w20: F1.1@1623,3669 1623,3817 S1.3@1629,3823
NetGSM_UART_3: GSM_UART.3 U1.36 U4.32 | length 3965.8
  Top Layer w10: U4.32@4402.45,2922.5 4442.5,2922.5 4494,2974 4922.5,2974 5342,3393.5 5342,3626 5513,3797 v2(5514,3797) ; GSM_UART.3@6006,3971 6007,3971 6321,3657 6486,3657 6638,3505 6638,3020 6445,2827 6321,2827 6288.25,2794.25 U1.36
  Bottom Layer w10: v2(5514,3797) 5839,3797 GSM_UART.3@6011,3969
NetGSM_UART_4: GSM_UART.4 U1.35 U4.33 | length 3852.2
  Top Layer w10: U4.33 4916.36,2993.36 5321,3398 5321,3664 5503,3846 v2(5503,3844) ; GSM_UART.4 5910,3969 6244,3635 6481.75,3635 6596,3520.75 6596,3068 6373,2845 6249,2845 6233,2829 6233,2772 U1.35@6230,2769
  Bottom Layer w10: v2@5500,3842 5781,3842 GSM_UART.4@5909,3970
NetJ1_5: J1.5 R3.1 | length 671.7
  Top Layer w10: R3.1@5930,3089 5930,3113 5966,3149 6006,3149 ; 6005.5,3149.5 6119,3263 6370,3263 v2@6443,3336
  Bottom Layer w10: v2(6444,3339) J1.5@6444,3381
NetJ1_6: J1.6 R5.1 | length 695.3
  Top Layer w10: R5.1@5829,3092 5916,3179 5964,3179 6083,3298 v2(6347,3298)
  Bottom Layer w10: v2(6347,3298) J1.6@6439,3298
NetLCD_3: LCD.3 R12.2 | length 4444.3
  Bottom Layer w10: R12.2 3039,3260 2978,3199 2978,2699 4142,1535 4142,1215 4203,1154 5873,1154 LCD.3@5947,1228
NetLCD_19: LCD.19 R14.1 | length 1547.5
  Top Layer w20: LCD.19@4324,1224 4324,1262 4377,1315 R14.1
NetLED1_1: LED1.1 U1.8 | length 1220.1
  Top Layer w10: U1.8 5683.75,1937.25 6290,1331 LED1.1@6290,1225
NetLED1_2: LED1.2 R2.2 | length 152.5
  Top Layer w10: LED1.2@6362.46,1231 R2.2@6515,1231
NetLED2_2: LED2.2 R20.1 | length 184.5
  Top Layer w10: R20.1 LED2.2@2245,4030
NetLED3_2: LED3.2 R22.1 | length 143.1
  Top Layer w10: R22.1 LED3.2@2751,3178
NetLED4_2: LED4.2 R23.1 | length 143.1
  Top Layer w10: R23.1 LED4.2@2750,3354
NetPOWER1_1: POWER1.1 S1.1 | length 431.4
  Top Layer w20: POWER1.1@1341.5,3735.5 1619,4013 S1.1@1658,4013
NetPOWER1_2: POWER1.2 S1.4 | length 1223.9
  Bottom Layer w20: POWER1.2@1319,3976 1143,3976 1117,3950 1117,3780 1249,3648 1493,3648 1602,3757 1765,3757 S1.4@1831,3823
NetQ1_1: Q1.3 R21.2 | length 280.5
  Top Layer w10: R21.2 1795.54,3173 Q1.3
NetQ1_2: Q1.1 R24.2 | length 169.6
  Top Layer w10: Q1.1@1945.54,3213.43 R24.2
NetQ2_1: Q2.3 R22.2 | length 410.3
  Top Layer w10: Q2.3 2284.43,3098 2461,3098 R22.2 R22.2@2526.46,3178
NetQ2_2: Q2.1 R25.2 | length 169.6
  Top Layer w10: Q2.1 R25.2@2138.57,3379.97
NetQ3_1: Q3.3 R23.2 | length 239.2
  Top Layer w10: Q3.3 2399.43,3213.43 R23.2
NetQ3_2: Q3.1 R26.2 | length 169.6
  Top Layer w10: Q3.1@2325.54,3213.43 R26.2
NetR39_2: R39.2 U6.9 | length 325.5
  Top Layer w10: U6.9 3898.37,1712.63 R39.2@4060,1551
NetR40_1: R40.1 U6.11 | length 273.1
  Top Layer w10: U6.11@3800,1752 3885,1752 3913,1724 R40.1
NRET: LCD.17 U4.6 | length 2325
  Top Layer w10: v3@3943.21,3190.21 U4.6
  Bottom Layer w10: v3@3936,3191 3936,3190 3912,3166 3912,2916 4074,2754 4074,2430 4527,1977 LCD.17@4527,1223
  other v3: 3937,3190
NRST: C22.1 D2.1 JTAG.11 K17.1 R19.1 U4.58 | length 2480.4
  Top Layer w10: K17.1@2856,3684.66 K17.1@2856,3985 ; K17.1@2857,3686 2912,3686 3016.46,3790.46 C22.1 3013,3795.46 R19.1 ; D2.1 2939.54,3940.46 2966.46,3913.54 R19.1 ; JTAG.11@3719,3862 3771,3810 3771,3647 3836,3582 4153,3582 4224.42,3510.58 U4.58@4224.42,3356.5 ; JTAG.11@3721,3864 3671,3914 3013.46,3914 R19.1
NRSTPD: NFC_SPI.6 U4.43 | length 1059.7
  Top Layer w10: U4.43 4600.21,3190.21 4823,3413 4823,3822 NFC_SPI.6@4970,3969
NSS: NFC_SPI.8 U4.41 | length 1195
  Top Layer w10: U4.41 4621.84,3150.84 4873,3402 4873,3671 NFC_SPI.8@5171,3969
PSB: LCD.15 U4.5 | length 2361.1
  Top Layer w10: U4.5 4191.1,3209.9 v3@4272,3129
  Bottom Layer w10: v3(4274,3128) 4274,3127 4324,3077 4324,2242 4641,1925 4641,1393 4728,1306 LCD.15@4728,1225
R0: K1.2 K2.2 K3.2 K4.2 R9.2 | length 2092.8
  Top Layer w10: K4.2@2988,2572 R9.2
  Bottom Layer w10: K1.2@1181.64,2573.07 K4.2@2984.93,2573.07
R1: K5.2 K6.2 K7.2 K8.2 R10.2 | length 2266.2
  Top Layer w10: K8.2@2984,2171 3060,2247 3060,2313 3234,2487 R10.2
  Bottom Layer w10: K5.2@1180.93,2173.07 K8.2@2984,2173.07
R2: K9.2 K10.2 K11.2 K12.2 R11.2 | length 2574.1
  Top Layer w10: K12.2@2990,1768 3116,1894 3116,2274 3244,2402 R11.2
  Bottom Layer w10: K9.2@1181.64,1773.07 2982.93,1773.07 K12.2@2983,1773
R3: K13.2 K14.2 K15.2 K16.2 R13.2 | length 2902.5
  Top Layer w10: K16.2@2984,1368 3179,1563 3179,2254 3231,2306 R13.2@3278,2306
  Bottom Layer w10: K13.2@1183,1373 1183.07,1373.07 K16.2@2984,1373.07 ; K14.2@1691.64,1373.07 K14.2@1696.64,1368.07 ; K15.2@2176.64,1368.07 K15.2@2181.64,1373.07
R/W: LCD.5 U4.3 | length 2884.5
  Top Layer w10: U4.3@4034.76,3250 U4.3@4035.76,3249 ; U4.3 4283.73,3249.27 v3@4305.5,3227.5
  Bottom Layer w10: v3@4305.5,3227.5 4309.5,3227.5 4515,3022 4515,2914 4881,2548 4881,2278 5410,1749 5410,1625 5740,1295 LCD.5@5740,1220
  other v3: 4307,3229
RI: U6.2
RS: LCD.4 U4.2 | length 2976.8
  Top Layer w10: U4.2 v3@4345,3268.95
  Bottom Layer w10: v3(4347,3268) 4347,3265 4553,3059 4553,2923 4918,2558 4918,2294 5456,1756 5456,1680 5847,1289 LCD.4@5847,1222
RTS: U6.24
SCL: U2.6 U4.36 | length 656.6
  Top Layer w10: U4.36 4640.42,3052.42 U2.6@4986,3398
SDA: U2.5 U4.37 | length 597.1
  Top Layer w10: U4.37 4615.1,3072.1 U2.5@4936.5,3393.5
SET1: NFC_SPI.5 U4.44 | length 995.5
  Top Layer w10: U4.44 4587.9,3209.9 4795,3417 4795,3901 NFC_SPI.5@4868,3974
SIM_CLK: R8.1 U1.25 | length 141.1
  Top Layer w10: R8.1@5606,2872 5616,2872 5640,2848 ; 5638,2848 5660,2826 U1.25@5660,2760
SIM_IO: R4.2 U1.27 | length 141.3
  Top Layer w10: R4.2@5724,2884 5773,2835 U1.27@5773,2763
SIM_RST: R7.1 U1.26 | length 307.1
  Top Layer w10: R7.1@5608,3017 5614,3017 5671,2960 5671,2864 ; 5670,2866 5717,2819 U1.26@5717,2761
SIMO1: NFC_SPI.4 U4.45 | length 926.8
  Top Layer w10: U4.45 4577.58,3229.58 4769,3421 NFC_SPI.4@4769,3972
SOMI1: NFC_SPI.3 U4.46 | length 916.1
  Top Layer w10: U4.46 4568.27,3249.27 4738,3419 4738,3906 NFC_SPI.3@4672,3972
TCK: JTAG.7 U4.57 | length 736.2
  Top Layer w10: JTAG.7@3921,3864 3969,3816 3969,3630 3996,3603 4158,3603 4244.1,3516.9 U4.57@4244.1,3356.5
TDI: JTAG.3 U4.55 | length 579.5
  Top Layer w10: JTAG.3@4117,3867 4170,3814 4170,3643 4283.47,3529.53 U4.55@4283.47,3356.5
TDO: JTAG.1 U4.54 | length 541.8
  Top Layer w10: JTAG.1@4219,3868 4303,3784 U4.54@4303,3361
TMS: JTAG.5 U4.56 | length 637.4
  Top Layer w10: JTAG.5@4014.5,3862.5 4069,3808 4069,3670 4117.7,3621.3 4165.7,3621.3 4263.79,3523.21 U4.56@4263.79,3356.5
UCLK1: NFC_SPI.2 U4.47 | length 910.6
  Top Layer w10: U4.47 4557.95,3268.95 4715,3426 4715,3824 NFC_SPI.2@4570,3969
URXD1: U4.35 U6.26 USB_UART.1 | length 3478.8
  Top Layer w10: U6.26 3563.22,1732.32 3532,1763.53 3532,1864.28 v2@4109.86,2442.14 ; v2@4285,3036 4394,3036 4397,3033 U4.35@4471,3033 ; U4.35@4462,3032 4894.72,3032 5280,3417.28 5280,3776.28 5406.72,3903 5437.54,3903 5455,3920.46 USB_UART.1
  Bottom Layer w10: v2(4109,2444) 4109,2855 v2@4286,3032
  other v2: 4287,3036
USB_RXD: U4.34 U6.25 USB_UART.2 | length 3515.5
  Top Layer w10: U6.25 3571.82,1752 3552,1771.82 3552,1834 v2@4139,2421 ; v2@4295,3001 4395,3001 4407,3013 U4.34@4472,3013 ; U4.34@4460,3014 4905,3014 5300,3409 5300,3768 5415,3883 5517.54,3883 5555,3920.46 USB_UART.2
  Bottom Layer w10: v2(4141,2421) 4141,2846 v2(4296,3001)
VCC-3.3V: C27.2 D2.2 GSM_UART.2 JTAG.2 LED2.1 NFC_SPI.1 R19.2 U1.53 U1.54 U3.2 U3.4 U4.1 U4.64 | length 8670.9
  Top Layer w10: U3.2@2204.95,3770 U3.2@2231,3770 ; R19.2@3012.73,3980.73 R19.2 ; U4.1 4035.5,3343.5 4051.5,3359.5 U4.64
  Top Layer w20: U3.2@2204,3766 2234,3766 2322,3854 2322,4030 2463,4030 2624,3869 2759,3869 2788,3898 2788,4079 2843,4134 2953,4134 D2.2@3008,4079 ; U3.2@2226,3766 2267,3725 U3.4@2443,3725 ; D2.2 3006.46,3985.54 R19.2@3012,3980 ; R19.2 NFC_SPI.1@4463.54,3980.46 ; C27.2@3926,3368 4028,3368 v2@4041,3355 ; GSM_UART.2@6109,3970 6109,3919 6339,3689 6495,3689 6682,3502 6682,2037 6470,1825 6470,1883 U1.53@6469,1884
  Bottom Layer w20: v2@4041,3353 4005,3389 4005,3549 4220,3764 4387,3764 4466,3843 NFC_SPI.1@4466,3971 ; NFC_SPI.1@4470,3974 4564,4068 6053,4068 6110,4011 GSM_UART.2
  other v2: 4040,3354
VCC-5V: BEEP1.1 C10.2 C11.2 C20.1 C21.2 D1.2 F1.2 GSM_UART.1 LCD.2 LED3.1 LED4.1 R12.1 R14.2 U1.22 U2.8 U3.3 | length 10282
  Top Layer w20: BEEP1.1@1487,3423 1693.46,3629.46 F1.2@1693.46,3670 ; F1.2@1694,3671 D1.2@1760,3671 ; D1.2@1760,3666 1809,3617 2027,3617 2059,3649 2059,3835 C20.1@2096,3872 ; C21.2@2062,3693 2190,3693 U3.3@2204,3679 ; U3.3@2204.95,3679.45 2360.55,3679.45 2445,3595 v5(3018,3595) ; LED3.1@2813,3182 LED3.1@2818,3177 ; LED3.1@2815,3177 2815,3353 2864,3402 2934,3402 2977,3359 R12.1@3070,3359 ; R12.1@3070,3361 3486,3361 v5(3484,3363) ; v5(5044,3315) 5050,3315 5085,3350 U2.8@5085,3417 ; C11.2@5180,3507 5101,3507 5084,3490 5084,3416 5199,3416 5237,3454 5237,3831 5372,3966 5372,4002 5409,4039 6137,4039 GSM_UART.1@6209,3967 ; v5(5411,2779) U1.22@5494,2779 ; U1.22@5493,2761 5493,3312 5642,3461 5642,3551 v5(5779,3688) ; v5(5717,1834) 5717,1544 5849,1412 5849,1349 5903,1295 6024,1295 6045,1274 LCD.2
  Bottom Layer w20: v5(3018,3595) 3067,3546 R12.1@3067,3358 ; v5(3484,3363) 3851,3363 3899,3315 v5(5044,3315) ; v5(5411,2779) 5381,2749 5381,2633 5717,2297 v5(5717,1834) ; v5(5779,3688) 5894,3803 6113,3803 6209,3899 GSM_UART.1@6209,3971
VCCUSB: C42.1 C43.2 P6.1 U6.7 U6.8 | length 1066.8
  Top Layer w20: P6.1@3625,1403 3625,1562 v5(3648,1585) ; P6.1 3627.02,1334.98 3702,1260 3800,1260 3834,1294 3945,1294 C42.1@3973,1266 ; 3770,1658 v5(3804,1658) 3804,1688 ; C42.1@3953,1294 3967,1280 4052,1280 C43.2@4076,1304
  Bottom Layer w20: v5(3648,1585) 3651,1585 3689,1623 3789,1623 3805,1639 3805,1659 v5(3804,1658)
VSIM: R6.1 U1.28 | length 112
  Top Layer w20: U1.28@5832,2760 R6.1@5832,2872
pads on no net: JTAG.4 JTAG.6 JTAG.8 JTAG.10 JTAG.12 JTAG.13 JTAG.14 LCD.16 LCD.18 P6. P6.5 P6.MH1 P6.MH2 S1.2 S1.5 U1.1 U1.2 U1.3 U1.4 U1.5 U1.6 U1.7 U1.10 U1.11 U1.12 U1.13 U1.14 U1.15 U1.16 U1.17 U1.18 U1.19 U1.20 U1.21 U1.23 U1.24 U1.29 U1.30 U1.31 U1.32 U1.33 U1.34 U1.37 U1.38 U1.39 U1.40 U1.41 U1.42 U1.43 U1.44 U1.45 U1.46 U1.47 U1.48 U1.49 U1.50 U1.51 U1.52 U1.57 U1.58 U1.59 U1.61 U1.62 U1.63 U1.64 U1.65 U1.66 U1.67 U2.7 U4.7 U4.10 U4.11 U4.28 U4.29 U4.30 U4.31 U4.38 U4.39 U4.40 U4.48 U4.49 U4.50 U4.51 U6.10 U6.12 U6.13 U6.14 U6.15 U6.16 U6.17 U6.18 U6.19 U6.20 U6.21 U6.22
copper on no net:
  other v7: 3370,1230 6780,1230 1163,2738 3370,3745 6780,3745

## Polygon pours and split planes (outlines as drawn)
GND on Top Layer "GND" (solid, remove dead copper): 992.67,2787.13 1585.67,3380.13 1607.67,3402.13 1612.67,3407.13 2391.67,3407.13 2580.67,3596.13 2580.67,4177.13 6904.67,4177.13 6909.67,4172.13 6905.67,4168.13 6905.67,1084.13 994.67,1084.13
GND on Bottom Layer "GND" (solid, remove dead copper, pour order 1001): 2588.26,4189.69 2588.26,3634.69 2588.26,3623.69 2386.26,3421.69 2372.26,3407.69 1769.26,3407.69 1621.26,3407.69 1224.26,3010.69 1005.26,2791.69 1005.26,1099.69 6908.26,1099.69 6911.26,1102.69 6915.26,1106.69 6915.26,4189.69

## Keep-outs
Keep-Out Layer:
  lines w20: 1003,1098 6916,1098 6916,4187 ; 1005,1100 1005,4187 1006,4188 ; 1005,4188 6916,4188

## Silkscreen, mask and mechanical layers (free items; w line width, h text height)
Bottom Overlay:
  text "SeedClass 2008, HUST" at 5467,3727 h60
  text "2010.01.10" at 4845,3529 h60
  text "NFC-Mobile" at 4866,3364 h60

## Dimensions
1003,1098 to 6916,1098 on Keep-Out Layer
1005,4187 to 1003,1098 on Keep-Out Layer

## Text inside footprints (layer, text, board x,y; h text height)
BEEP1: Top Overlay "+" at 1457,3535 h60 r270
J1: Bottom Overlay "SIM" at 6843,3472 h118.11
JTAG: Top Overlay "2" at 4273,3750 h50; Top Overlay "1" at 4288,3848 h50; Top Overlay "13" at 3498,3870 h50; Top Overlay "14" at 3495,3756 h50
P6: Mechanical 1 "PCB Edge" at 3531.1,1082.97 h9.84